# Altium PCB MainPcb.PcbDoc
Units mm, origin at the board's own origin, x right, y up, seen from the top; angles counter-clockwise.
Board outline 40 x 40 mm, 2 copper layers (Top Layer, Bottom Layer); 5 components, 31 nets, 85 pads, 0 vias.
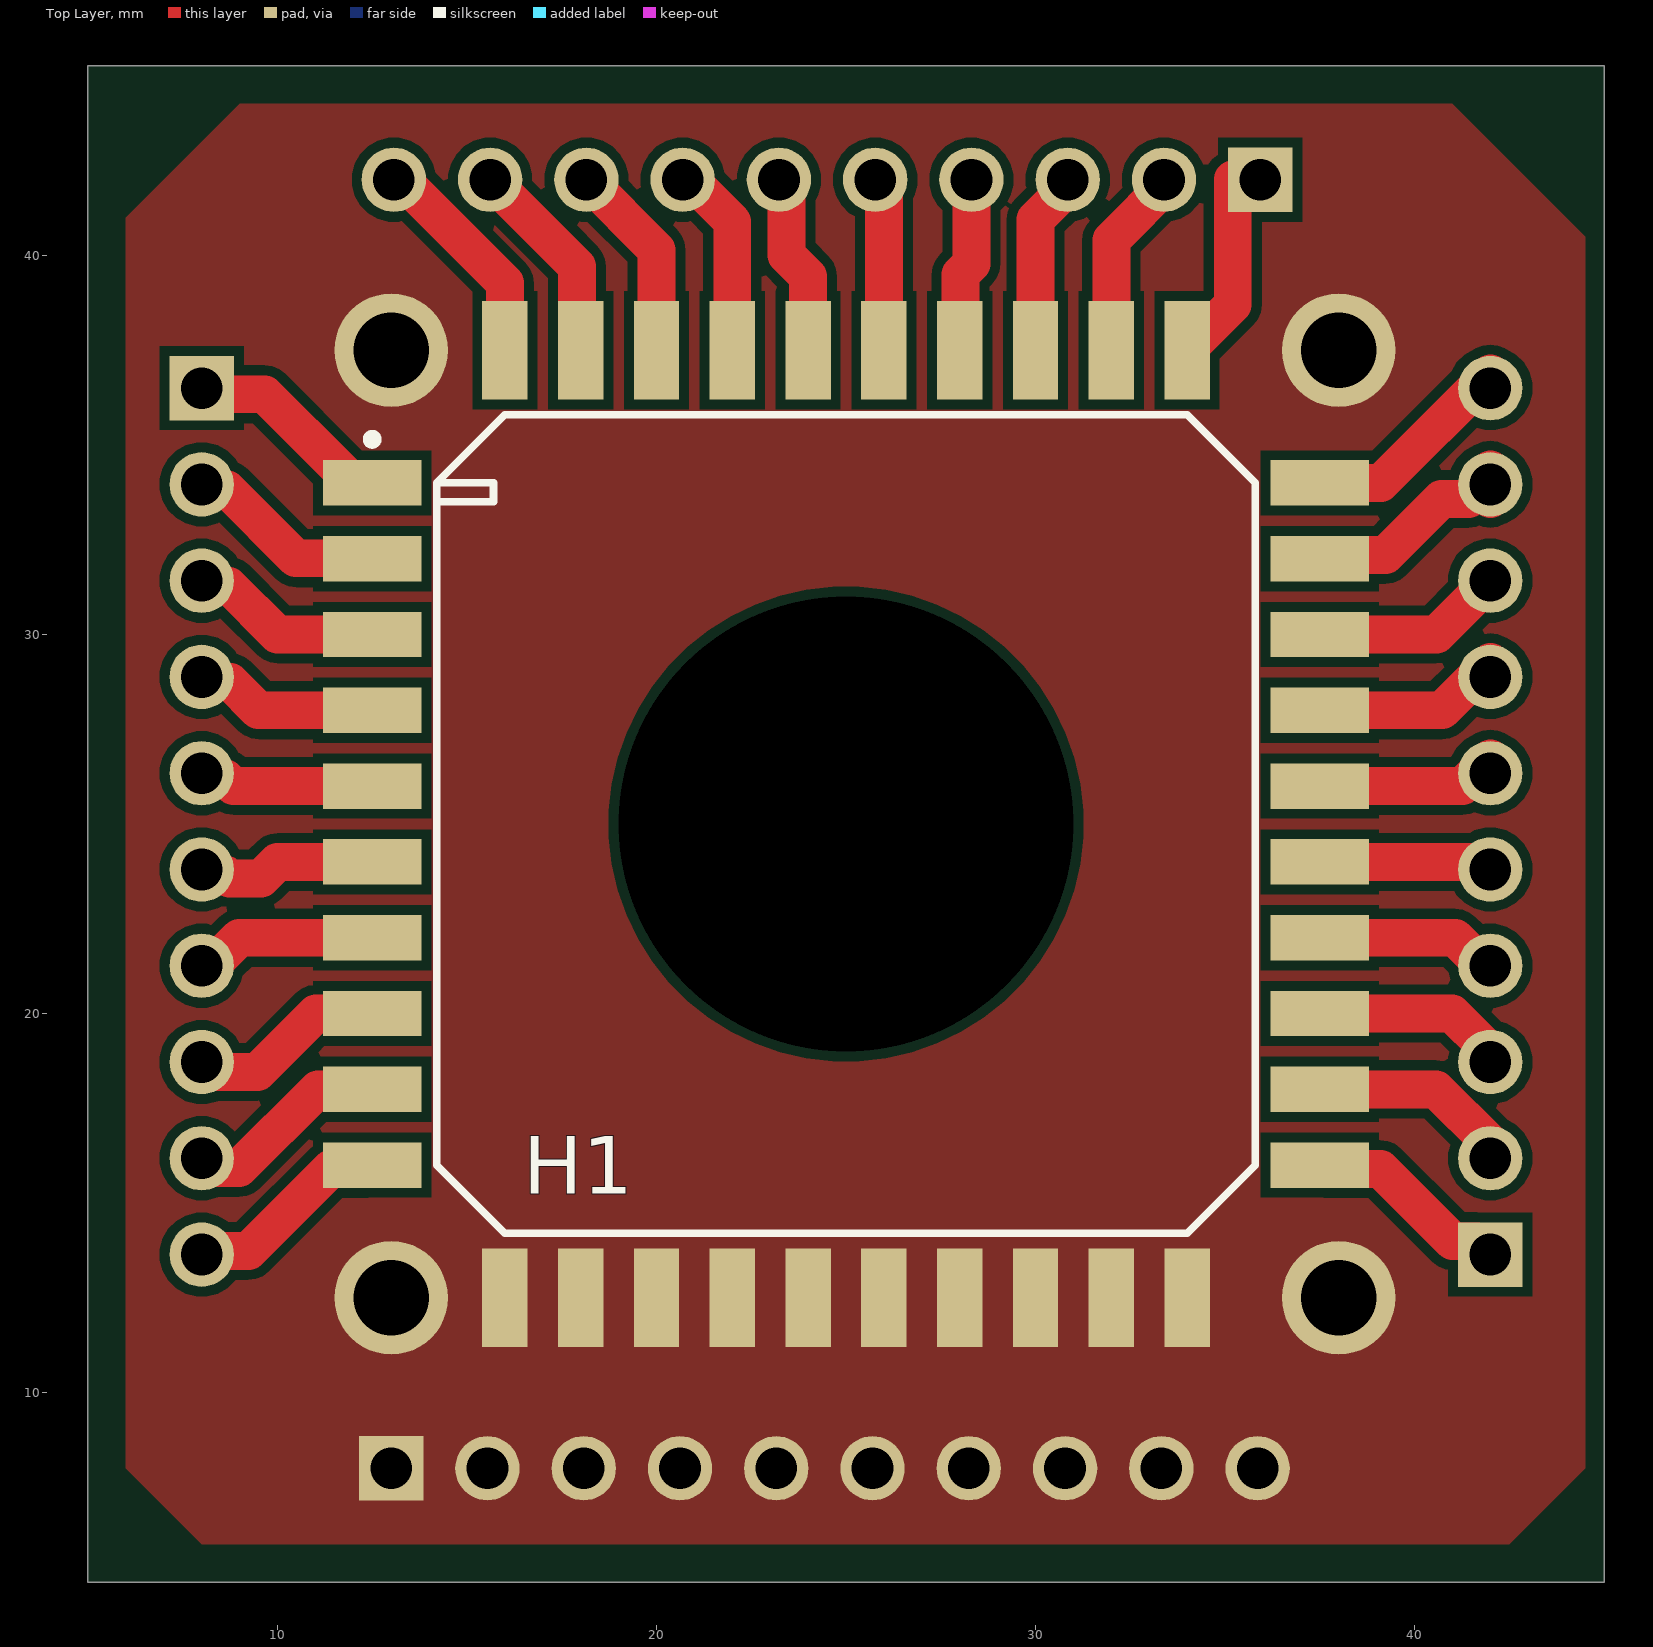
[diagram p0: Top Layer view]
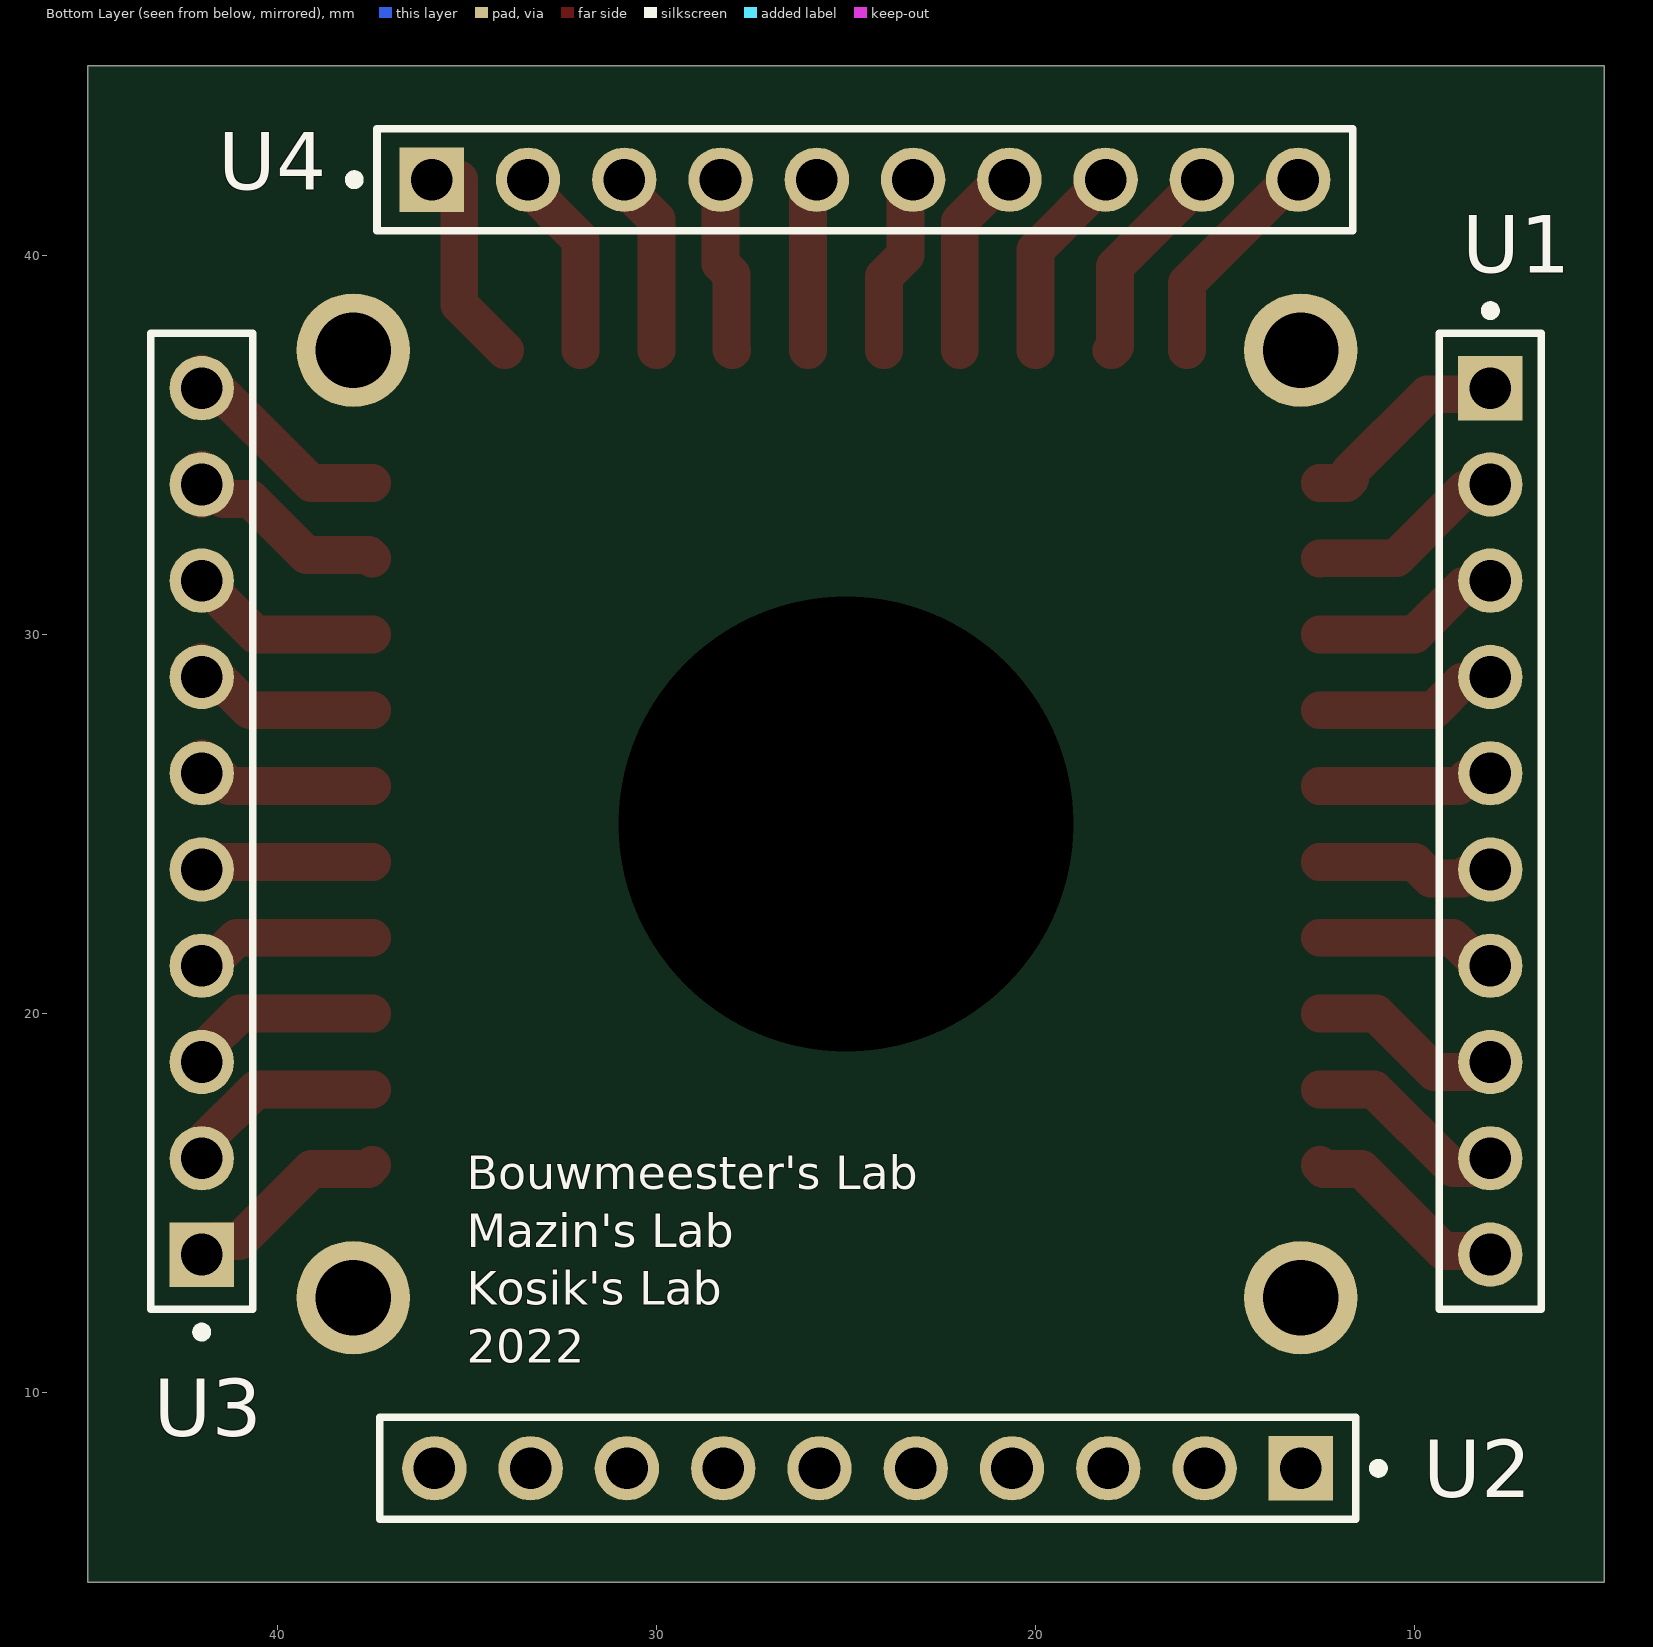
[diagram p1: Bottom Layer view, seen from below]
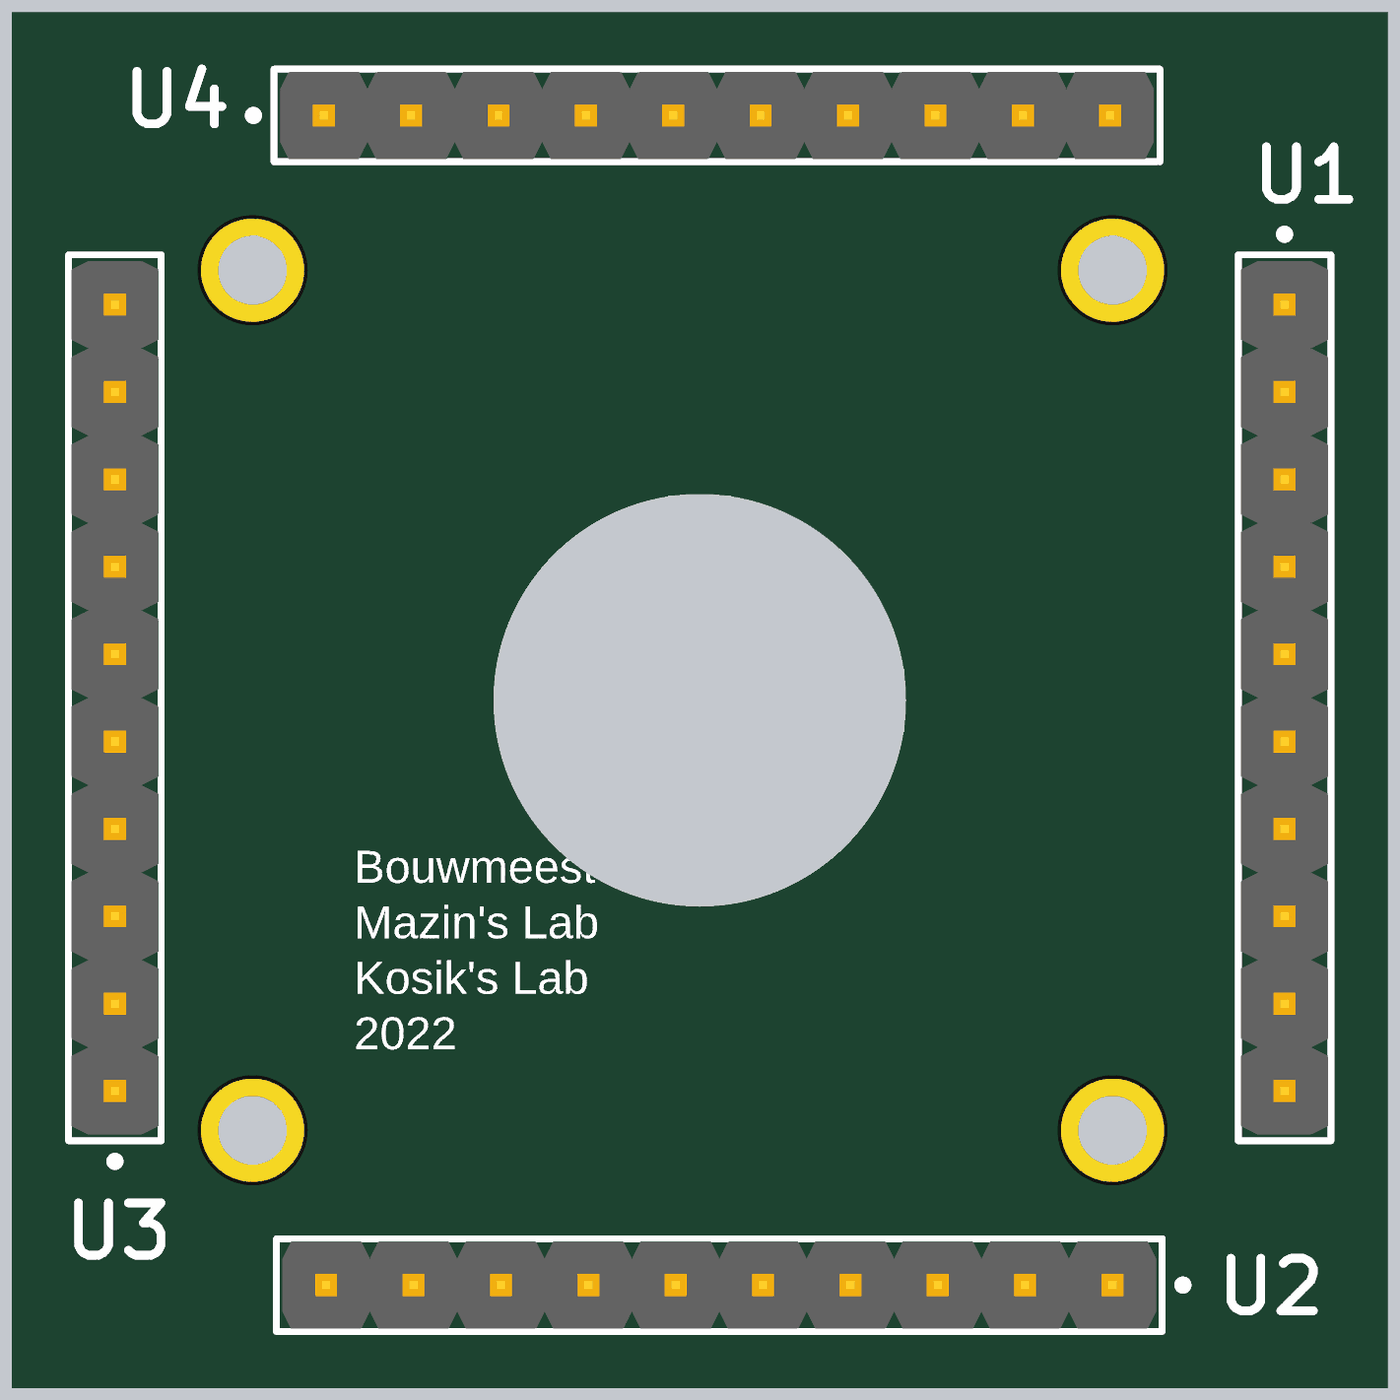
[diagram p2: 3D render of the assembled board from below, using the file's embedded part models]

## Layer stack, top to bottom
Top Solder: solder mask 0.0102, Solder Resist, Dk 3.5
Top Layer: signal copper 0.0356
Dielectric 1: dielectric 0.32, FR-4, Dk 4.8
Bottom Layer: signal copper 0.0356
Bottom Solder: solder mask 0.0102, Solder Resist, Dk 3.5

## Board outline
5,5 5,45 45,45 45,5

## Design rules (kind name [scope] priority, off if disabled: settings)
Clearance [All] p1: gap=0.254 ignorepadtopadclearanceinfootprint=FALSE except(0: Arc-Hole Track-Hole SMDPad-Hole THPad-Hole Via-Hole Fill-Hole Poly-Hole Region-Hole Text-Hole)
PlaneConnect [All] p1: planeconnectstyle=Direct reliefexpansion=0.508 reliefentries=4 reliefconductorwidth=0.254 reliefairgap=0.254
PolygonConnect [All] p1: connectstyle=Direct reliefconductorwidth=0.254 reliefentries=4 polygonreliefangle="90 Angle" airgapwidth=0.254
RoutingVias [All] p1: holewidth=0.711 width=1.27 viastyle="Through Hole" minholewidth=0.711 minwidth=1.27 maxholewidth=0.711 maxwidth=1.27
SolderMaskExpansion [All] p1: expansion=0.102 istentingtop=FALSE
Width [All] p1: maxlimit=2 minlimit=0.5 preferedwidth=1
29 further rules are at their usual default settings.

## Components (designator, comment, footprint, x,y, rotation, side; value= is the part's Value field where it differs from the comment)
H1 "Silicon Die Holder 40 pin" CQFP200P2508X2508X310-40N 25,25 r0 top locked
U1 "61301011121" FP-61301011121-MFG 8,25.07 r270 bottom
U2 "61301011121" FP-61301011121-MFG 24.43,8 r0 bottom
U3 "61301011121" FP-61301011121-MFG 42,25.07 r90 bottom
U4 "61301011121" FP-61301011121-MFG 24.5,42 r180 bottom

## Footprints (in the part's own frame and the unit in brackets; to place one, negate y for a bottom-side part, rotate by r counter-clockwise, add the part's x,y. Pads: shape width x height; smd on the part's side, far side on the other; paste and mask are expansions set on the pad)
CQFP200P2508X2508X310-40N [mm] "CQFP, 40-Leads, Body 25.08x25.08mm, Pitch 2.00mm, IPC Medium Density"
  rect 2.6x1.2 smd: 1(-12.5,9) 2(-12.5,7) 3(-12.5,5) 4(-12.5,3) 5(-12.5,1) 6(-12.5,-1) 7(-12.5,-3) 8(-12.5,-5) 9(-12.5,-7) 10(-12.5,-9) 21(12.5,-9) 22(12.5,-7) 23(12.5,-5) 24(12.5,-3) 25(12.5,-1) 26(12.5,1) 27(12.5,3) 28(12.5,5) 29(12.5,7) 30(12.5,9)
  round 1.524 hole 12 unplated: 5(0,0)
  rect 1.2x2.6 smd: 11(-9,-12.5) 12(-7,-12.5) 13(-5,-12.5) 14(-3,-12.5) 15(-1,-12.5) 16(1,-12.5) 17(3,-12.5) 18(5,-12.5) 19(7,-12.5) 20(9,-12.5) 31(9,12.5) 32(7,12.5) 33(5,12.5) 34(3,12.5) 35(1,12.5) 36(-1,12.5) 37(-3,12.5) 38(-5,12.5) 39(-7,12.5) 40(-9,12.5)
  silkscreen extent -12.62,-10.8 10.8,10.8, body extent -10,-10 10,10, height 3.1
FP-61301011121-MFG [mm]
  rect 1.7x1.7 hole 1.1 paste-1000 mask+0: 1(-11.43,0)
  round 1.7 hole 1.1 paste-1000 mask+0: 2(-8.89,0) 3(-6.35,0) 4(-3.81,0) 5(-1.27,0) 6(1.27,0) 7(3.81,0) 8(6.35,0) 9(8.89,0) 10(11.43,0)
  silkscreen extent -13.6,-1.35 12.87,1.34, body extent -12.7,-1.27 12.7,1.27, height 8.54

## Part data
H1: library part "Silicon Die Holder 40 pin 20mm", "Silicon die holder 40 pin 20mm", Part Number="Silicon Die Holder 40 pin 20mm"
U1 U2 U3 U4: library part CMP-1502-01082-3, "CONN HEADER VERT 10POS 2.54MM", Color=Black, Current Rating=3A, Flammability Rating="UL94 V-0", Insulation Resistance=1GR, Max Operating Temperature=105°C, Min Operating Temperature=-40°C, Package Quantity=1000, Voltage Rating=250V, Connector Type=Header, Contact Finish - Mating=GOLD, Contact Gender=Male, Contact Material="Copper Alloy", Contact Mating Length=0.236inch, Contact Plating=Gold, Contact Shape=Square, Contact Type="Male Pin", Fastening Type=Pull, Gender=Male, Height=11.54mm, Housing Material=PBT, Insulation Color=Black, Insulation Material=Nylon, Length=2.54mm, Mount="Through Hole", Number of Contacts=10, Number of Positions=10, Number of Rows=1, Orientation=Straight, Packaging=Bulk, Pitch=2.54mm, RoHS Compliant=Yes, Series=WR-PHD, Termination=Solder, Width=25.4mm

## Free pads (board coordinates)
  round 3 hole 2: 6(13,12.5) 6(13,37.5) 6(38,12.5) 6(38,37.5)

## Nets (pads, with @x,y where several pads share a name; then routed paths per layer and width w, separated by ;. In a path a pad name is that pad's centre, name@x,y a point inside that pad or via, vN(x,y) a via of type N, cw(c..) or ccw(c..) an arc to the next point about the centre after c; other vN are vias at no path point)
GND: H1.11 H1.12 H1.13 H1.14 H1.15 H1.16 H1.17 H1.18 H1.19 H1.20 pad.6 U2.1 U2.2 U2.3 U2.4 U2.5 U2.6 U2.7 U2.8 U2.9 U2.10
NetH1_1: H1.1 U1.1 | length 5.7
  Top Layer w1: U1.1 8.161,36.339 9.661,36.339 11.7,34.3 11.7,34.1 11.8,34 H1.1
NetH1_2: H1.2 U1.2 | length 5.3
  Top Layer w1: U1.2 8.134,33.826 8.674,33.826 10.489,32.011 12.489,32.011 H1.2
NetH1_3: H1.3 U1.3 | length 5.1
  Top Layer w1: U1.3 8.134,31.286 8.714,31.286 10,30 H1.3
NetH1_4: H1.4 U1.4 | length 4.9
  Top Layer w1: U1.4 8.134,28.746 8.754,28.746 9.5,28 H1.4
NetH1_5: H1.5@12.5,26 U1.5 | length 4.6
  Top Layer w1: U1.5 8.134,26.206 8.629,26.206 8.835,26 H1.5@12.5,26
NetH1_6: H1.6 U1.6 | length 4.8
  Top Layer w1: U1.6@8,23.54 8.126,23.666 8.629,23.666 8.733,23.562 9.562,23.562 10,24 H1.6
NetH1_7: H1.7 U1.7 | length 4.9
  Top Layer w1: U1.7@8,21 9,22 H1.7
NetH1_8: H1.8 U1.8 | length 5.1
  Top Layer w1: U1.8@8,18.46 9.474,18.46 11.014,20 H1.8
NetH1_9: H1.9 U1.9 | length 5.4
  Top Layer w1: U1.9@8,15.92 8.986,15.92 11.066,18 H1.9
NetH1_10: H1.10 U1.10 | length 5.6
  Top Layer w1: U1.10@8,13.38 8,13.408 8.323,13.732 9.232,13.732 11.4,15.9 12.4,15.9 H1.10
NetH1_21: H1.21 U3.1 | length 5.5
  Top Layer w1: H1.21 37.6,15.9 39.1,15.9 41.01,13.99 41.65,13.99 U3.1
NetH1_22: H1.22 U3.2 | length 5.1
  Top Layer w1: H1.22 40.57,18 U3.2@42,16.57
NetH1_23: H1.23 U3.3 | length 4.9
  Top Layer w1: H1.23 40.992,20 41.866,19.126 41.866,19.043 U3.3@42,19.043
NetH1_24: H1.24 U3.4 | length 4.8
  Top Layer w1: H1.24 41.071,22 41.811,21.26 U3.4
NetH1_25: H1.25 U3.5 | length 4.6
  Top Layer w1: H1.25 41.611,24 41.677,23.934 41.811,23.934 U3.5@42,24.123
NetH1_26: H1.26 U3.6 | length 4.8
  Top Layer w1: H1.26 41.27,26 U3.6@42,26.73
NetH1_27: H1.27 U3.7 | length 5
  Top Layer w1: H1.27 40.73,28 U3.7@42,29.27
NetH1_28: H1.28 U3.8 | length 5.1
  Top Layer w1: H1.28 40.58,30 U3.8
NetH1_29: H1.29 U3.9 | length 6.1
  Top Layer w1: H1.29 37.6,32.1 39.237,32.1 40.716,33.579 41.429,33.579 41.677,33.826 41.811,33.826 U3.9@42,33.637 ; U3.9@42,33.579 U3.9@42,34.35
NetH1_30: H1.30 U3.10 | length 5.7
  Top Layer w1: H1.30 39.11,34 U3.10@42,36.89
NetH1_31: H1.31 U4.1 | length 5.9
  Top Layer w1: H1.31 35.204,38.704 35.204,42 U4.1@36.13,42
NetH1_32: H1.32 U4.2 | length 5.2
  Top Layer w1: H1.32 32,40.41 U4.2@33.59,42
NetH1_33: H1.33 U4.3 | length 4.9
  Top Layer w1: H1.33 30,40.95 U4.3@31.05,42
NetH1_34: H1.34 U4.4 | length 4.6
  Top Layer w1: H1.34 28.025,37.525 28.025,39.496 28.31,39.782 U4.4
NetH1_35: H1.35 U4.5 | length 4.6
  Top Layer w1: U4.5 25.77,41.811 26,41.581 H1.35
NetH1_36: H1.36 U4.6 | length 4.7
  Top Layer w1: U4.6@23.43,42 23.43,40.016 24,39.446 H1.36
NetH1_37: H1.37 U4.7 | length 5
  Top Layer w1: U4.7@20.89,42 22,40.89 H1.37
NetH1_38: H1.38 U4.8 | length 5.3
  Top Layer w1: U4.8 20,40.15 H1.38
NetH1_39: H1.39 U4.9 | length 5.5
  Top Layer w1: U4.9 17.9,39.71 17.9,37.6 H1.39
NetH1_40: H1.40 U4.10 | length 5.6
  Top Layer w1: U4.10@13.27,42 16,39.27 H1.40
pads on no net: H1.5@25,25

## Polygon pours and split planes (outlines as drawn)
GND on Top Layer "GND_L01_P000" (solid, pour order 0): 9,44 6,41 6,8 8,6 42.5,6 44.5,8 44.5,40.5 41,44

## Silkscreen, mask and mechanical layers (free items; w line width, h text height)
Bottom Overlay:
  text "Bouwmeester's Lab / Mazin's Lab / Kosik's Lab / 2022" at 35,10.5 h1.52
Mechanical 1:
  the board outline again, w0.254

## Dimensions
8,36.5 to 42,36.5 on Mechanical 13
13.07,42 to 13,8 on Mechanical 13